# Altium PCB PCB_Design.PcbDoc
Units mm, origin at the board's own origin, x right, y up, seen from the top; angles counter-clockwise.
Board outline 125.69 x 113.79 mm, 2 copper layers (Top Layer, Bottom Layer); 23 components, 85 nets, 142 pads, 0 vias.
Unrouted connection lines stored in the file: 11.
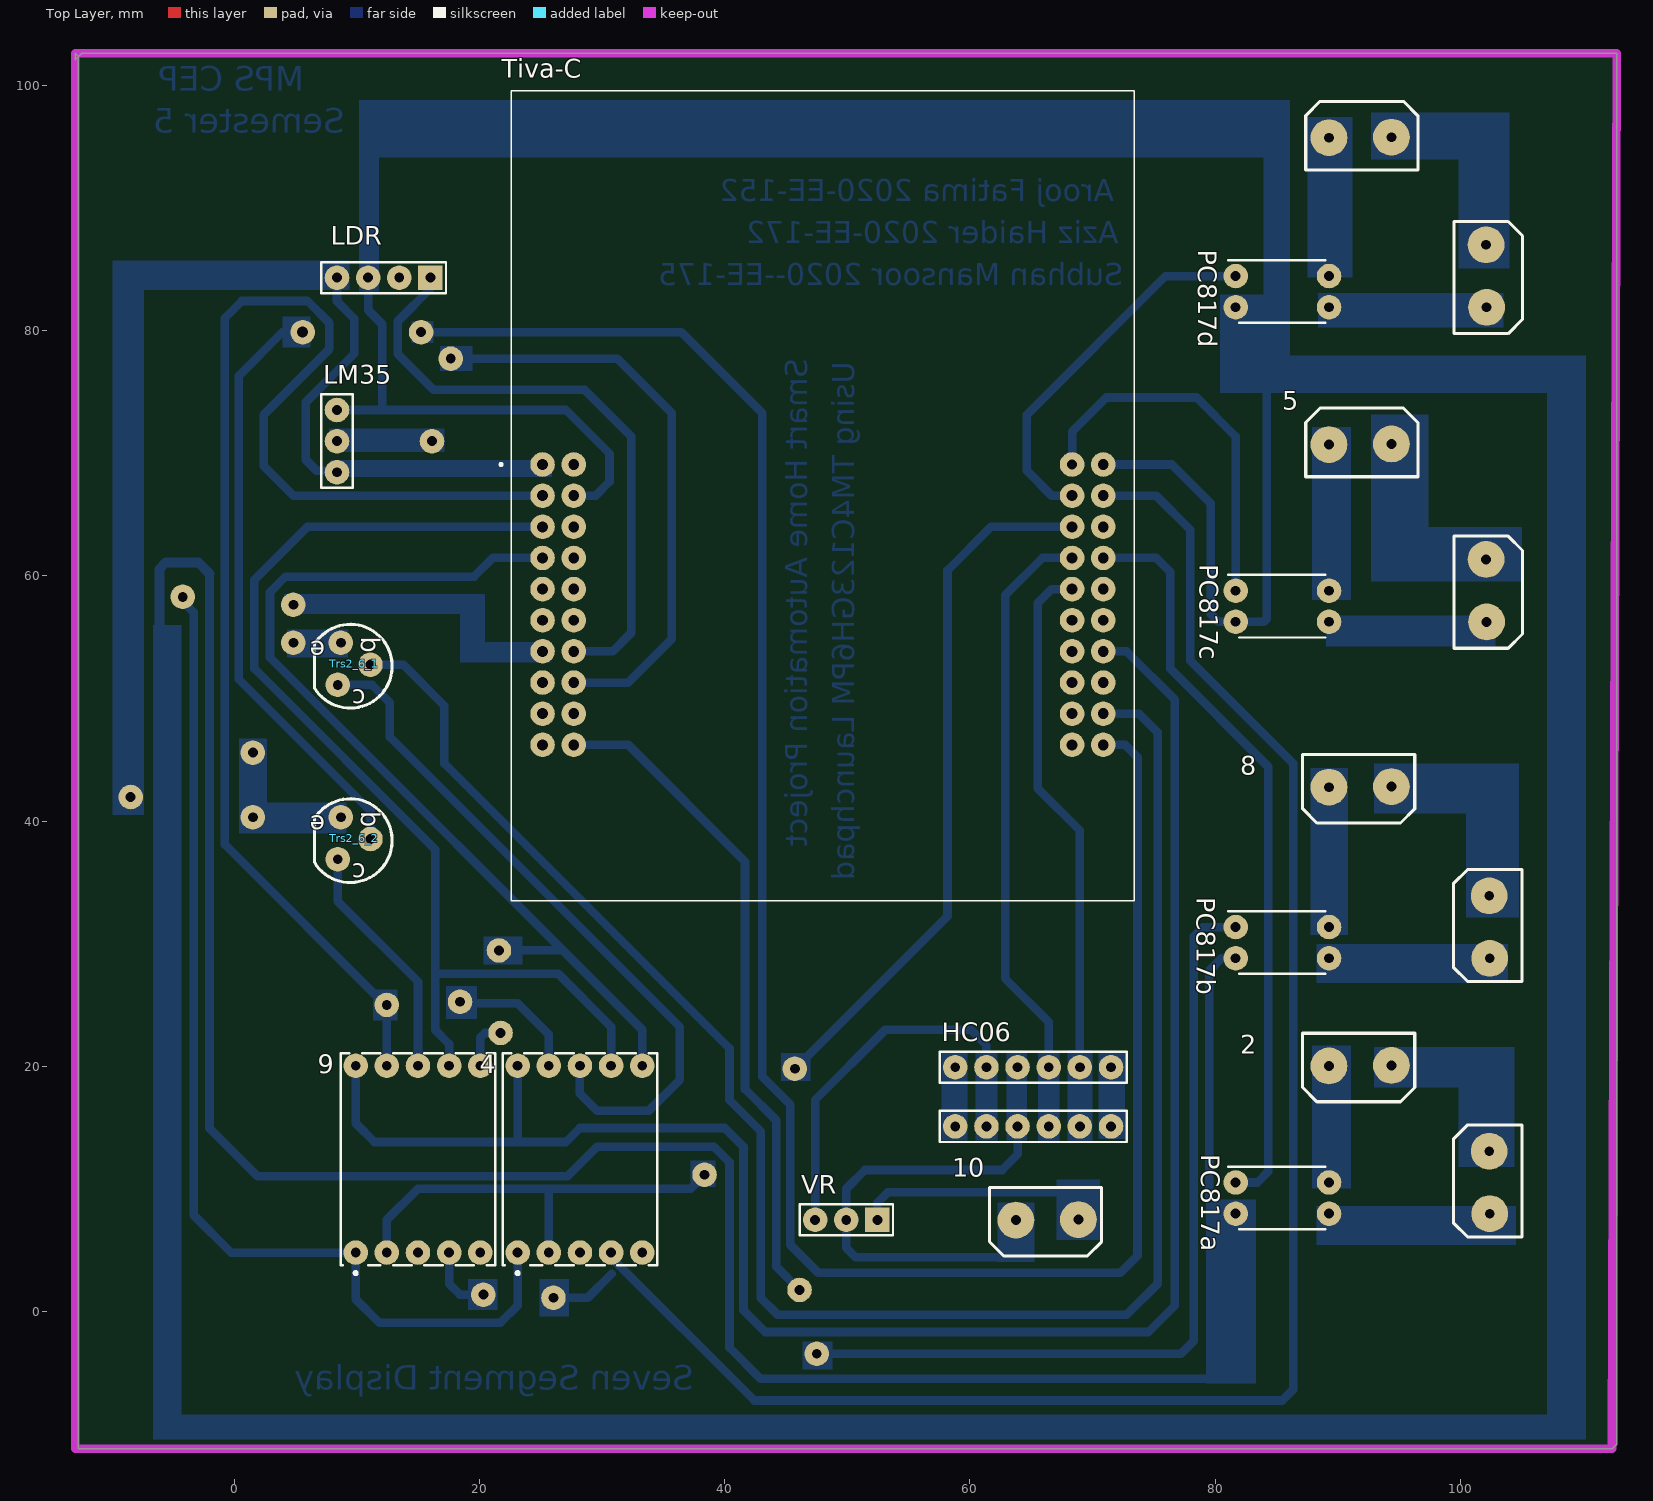
[diagram p0: Top Layer view]
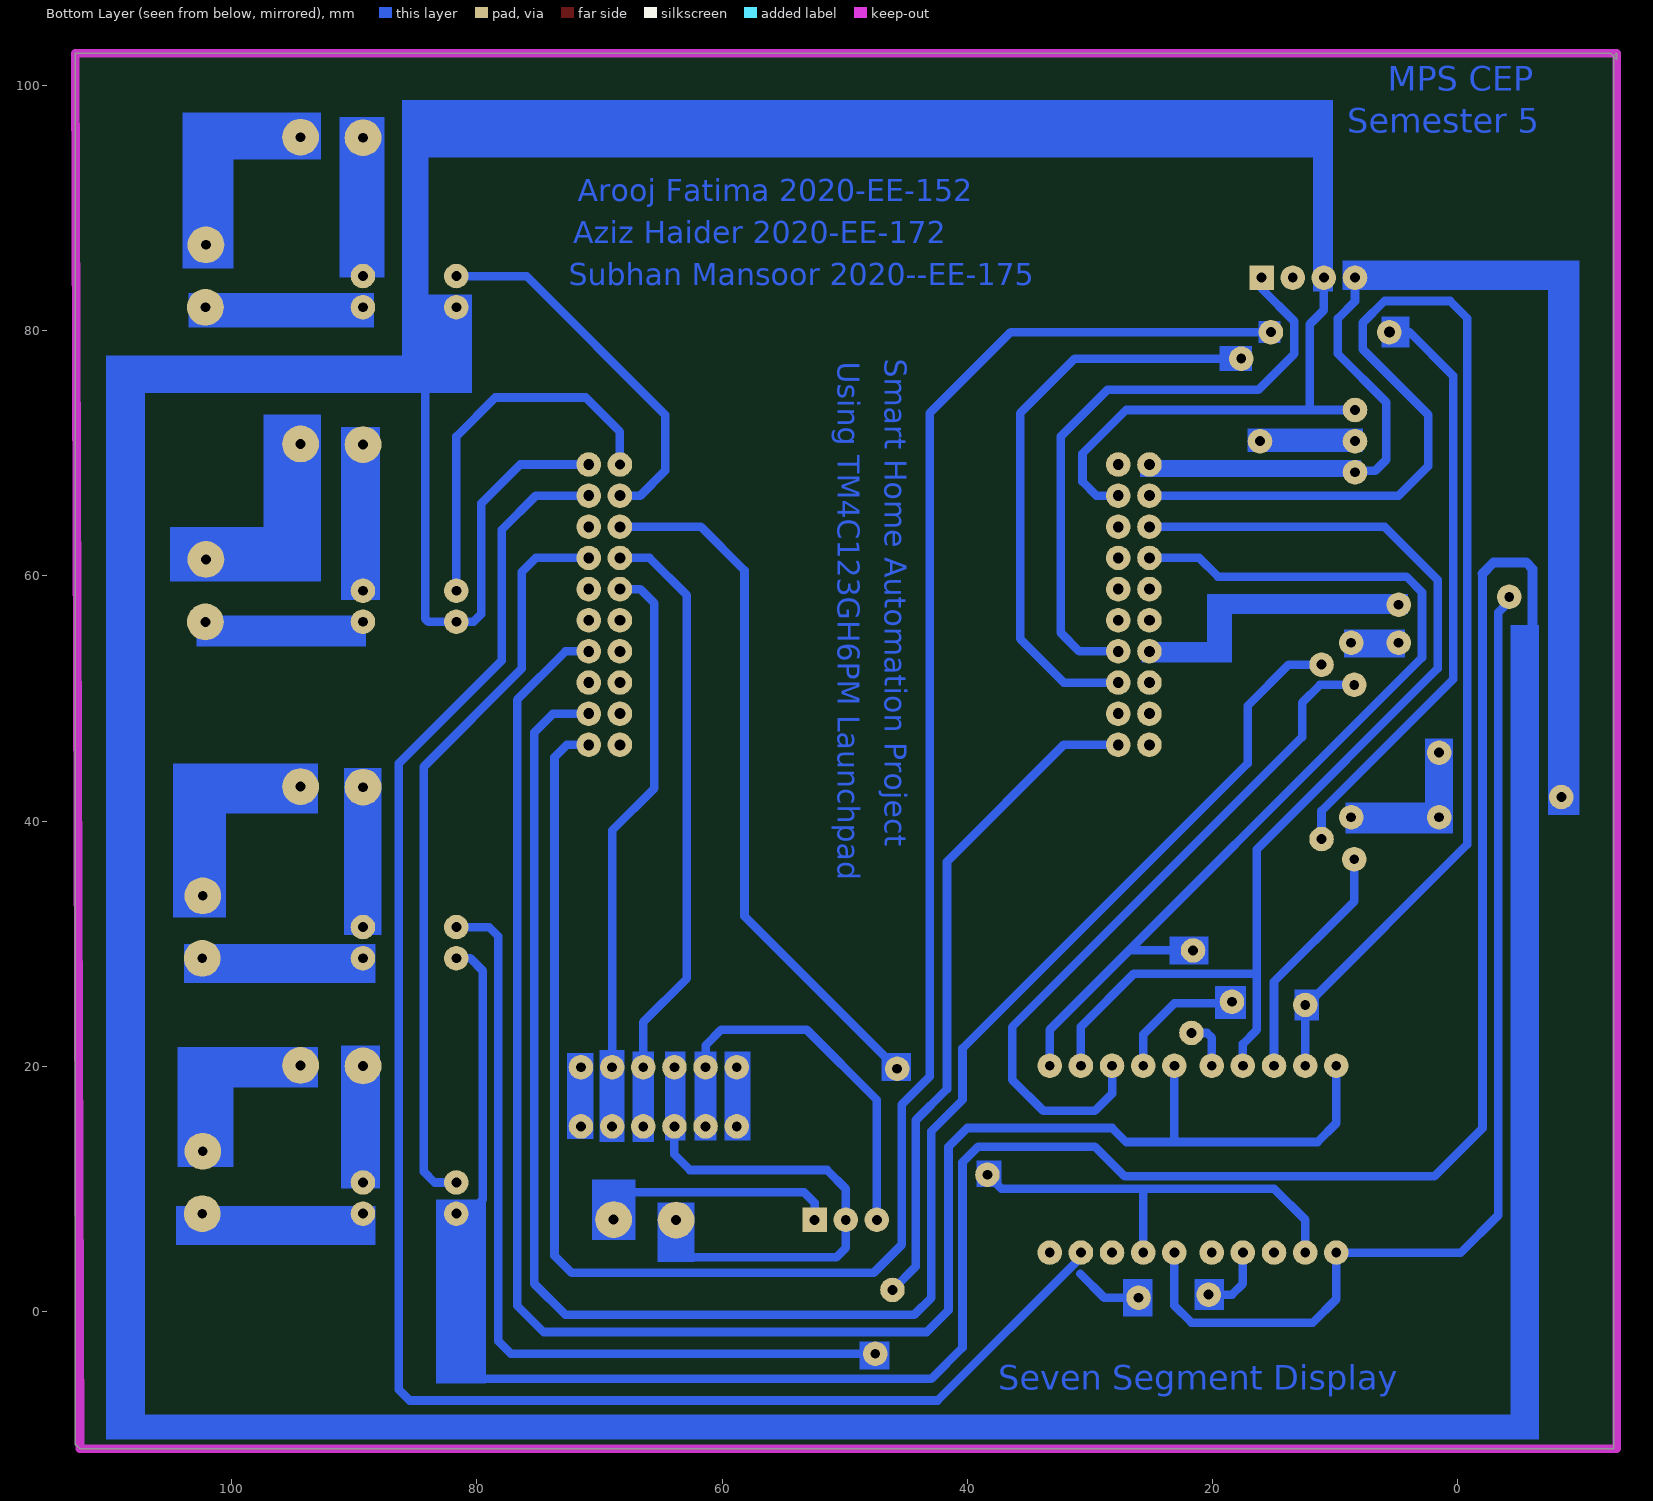
[diagram p1: Bottom Layer view, seen from below]

## Layer stack, top to bottom
Top Layer: signal copper 0.0356
Dielectric: dielectric 0.32, FR-4, Dk 4.8
Bottom Layer: signal copper 0.0356

## Board outline
-12.954,102.108 -12.446,102.616 112.732,102.616 112.732,-10.798 112.354,-11.176 -12.7,-11.176 -12.7,102.362 -12.954,102.616

## Design rules (kind name [scope] priority, off if disabled: settings)
Clearance [All] p1: gap=0.3
PolygonConnect [All] p1: connectstyle=Relief reliefconductorwidth=0.254 reliefentries=4 polygonreliefangle="90 Angle"
RoutingVias [All] p1: holewidth=0.711 width=1.27 viastyle="Through Hole" minholewidth=0.711 minwidth=1.27 maxholewidth=0.711 maxwidth=1.27
SilkscreenOverComponentPads [All] p1: minsilkscreentomaskgap=0.254
SolderMaskExpansion [All] p1: expansion=0.102
Width [All] p1: maxlimit=0.8 minlimit=0.254 preferedwidth=0.7 toplayer_maxwidth=0.254 toplayer_prefwidth=0.254 bottomlayer_minwidth=0.7 minimp=50.000000 maximp=50.000000 favimp=50.000000
27 further rules are at their usual default settings.

## Components (designator, comment, footprint, x,y, rotation, side; value= is the part's Value field where it differs from the comment)
2 "Comment" "PCB Block Connector" 91.821,20.066 r0 top
4 "Comment" LEDDIP-10/14.27RHD 28.194,12.446 r0 top
5 "Comment" "PCB Block Connector" 91.821,70.739 r180 top
8 "Comment" "PCB Block Connector" 91.821,42.799 r0 top
9 "Comment" LEDDIP-10/14.27RHD 14.986,12.446 r0 top
10 "Comment" "PCB Block Connector" 66.294,7.493 r0 top
HC06 "Comment" HDR1X6 71.501,19.939 r180 top
LDR "Comment" HDR1X4 16.002,84.328 r180 top
LM35 "Comment" HDR1X3#1 8.382,68.453 r90 top
PC817a "Comment" DIP762W60P254L460H450Q4N 85.471,9.271 r0 top
PC817b "Comment" DIP762W60P254L460H450Q4N 85.471,30.099 r0 top
PC817c "Comment" DIP762W60P254L460H450Q4N 85.471,57.531 r0 top
PC817d "Comment" DIP762W60P254L460H450Q4N 85.471,83.185 r0 top
Tiva-C "Comment" MODULE_EK-TM4C123GXL 48.006,66.548 r0 top
Trs2_6_1 "Comment" "TO-92 Packaging" 9.779,52.832 r180 top
Trs2_6_2 "Comment" "TO-92 Packaging" 9.779,38.608 r180 top
VR "Comment" HDR1X3#2 52.451,7.493 r180 top
? "Comment" "PCB Block Connector" 102.108,84.455 r90 top
? "Comment" "PCB Block Connector" 102.108,58.801 r90 top
? "Comment" "PCB Block Connector" 91.821,95.758 r180 top
? "Comment" "PCB Block Connector" 102.362,31.369 r270 top
? "Comment" HDR1X6 71.501,15.113 r180 top
? "Comment" "PCB Block Connector" 102.362,10.541 r270 top

## Footprints (in the part's own frame and the unit in brackets; to place one, negate y for a bottom-side part, rotate by r counter-clockwise, add the part's x,y. Pads: shape width x height; smd on the part's side, far side on the other; paste and mask are expansions set on the pad)
DIP762W60P254L460H450Q4N [mm]
  round 2 hole 0.8: 1(-3.81,1.27) 2(-3.81,-1.27) 3(3.81,-1.27) 4(3.81,1.27)
  silkscreen extent -4.41,-2.55 3.5,2.55
HDR1X3#1 [mm] "Connector; Header; 3 Position"
  round 2 hole 0.8: 1(0,0) 2(2.54,0) 3(5.08,0)
  silkscreen extent -1.27,-1.27 6.35,1.27
HDR1X3#2 [mm] "Connector; Header; 3 Position"
  rect 2x2 hole 0.8: 1(0,0)
  round 2 hole 0.8: 2(2.54,0) 3(5.08,0)
  silkscreen extent -1.27,-1.27 6.35,1.27
HDR1X4 [mm] "Connector; Header; 4 Position"
  rect 2x2 hole 0.8: 1(0,0)
  round 2 hole 0.8: 2(2.54,0) 3(5.08,0) 4(7.62,0)
  silkscreen extent -1.27,-1.27 8.89,1.27
HDR1X6 [mm] "Connector; Header; 6 Position"
  round 2 hole 0.8: 1(0,0) 2(2.54,0) 3(5.08,0) 4(7.62,0) 5(10.16,0) 6(12.7,0)
  silkscreen extent -1.27,-1.27 13.97,1.27
LEDDIP-10/14.27RHD [mm] "LED, 7-Segment Display, 14.27 mm, RHD; 10 Leads; Row Space 15.24 mm; Pitch 2.54 mm"
  round 2 hole 0.8: 1(-5.08,-7.62) 2(-2.54,-7.62) 3(0,-7.62) 4(2.54,-7.62) 5(5.08,-7.62) 6(5.08,7.62) 7(2.54,7.62) 8(0,7.62) 9(-2.54,7.62) 10(-5.08,7.62)
  silkscreen extent -6.3,-9.42 6.3,8.65, body extent -6.3,-8.65 6.3,8.65, height 8.3
MODULE_EK-TM4C123GXL [mm]
  round 2 hole 0.89: J1_1(-22.86,2.54) J1_2(-22.86,0) J1_3(-22.86,-2.54) J1_4(-22.86,-5.08) J1_5(-22.86,-7.62) J1_6(-22.86,-10.16) J1_7(-22.86,-12.7) J1_8(-22.86,-15.24) J1_9(-22.86,-17.78) J1_10(-22.86,-20.32) J2_1(22.86,2.54) J2_2(22.86,0) J2_3(22.86,-2.54) J2_4(22.86,-5.08) J2_5(22.86,-7.62) J2_6(22.86,-10.16) J2_7(22.86,-12.7) J2_8(22.86,-15.24) J2_9(22.86,-17.78) J2_10(22.86,-20.32) J3_1(-20.32,2.54) J3_2(-20.32,0) J3_3(-20.32,-2.54) J3_4(-20.32,-5.08) J3_5(-20.32,-7.62) J3_6(-20.32,-10.16) J3_7(-20.32,-12.7) J3_8(-20.32,-15.24) J3_9(-20.32,-17.78) J3_10(-20.32,-20.32) J4_2(20.32,0) J4_3(20.32,-2.54) J4_4(20.32,-5.08) J4_5(20.32,-7.62) J4_6(20.32,-10.16) J4_7(20.32,-12.7) J4_8(20.32,-15.24) J4_9(20.32,-17.78) J4_10(20.32,-20.32)
  round 2 hole 0.8: J4_1(20.32,2.54)
  silkscreen extent -26.35,-33.02 25.4,33.02
"PCB Block Connector" [mm]
  round 3 hole 0.8: 1(-2.547,-0.023) 2(2.547,0.023)
  silkscreen extent -4.7,-2.94 4.44,2.65
"TO-92 Packaging" [mm] "for 2N3904"
  round 2 hole 0.8: T(-1.333,0.063) T(1.08,-1.714) T(1.333,1.714)
  silkscreen extent -3.1,-3.23 3.22,3.61

## Part data
Tiva-C: library part EK-TM4C123GXL

## Free pads (board coordinates)
  round 2 hole 0.8: 2(20.32,1.397) 3(26.035,1.143) 4(38.354,11.176) 5(45.72,19.812) 6(21.59,29.464) 7(21.717,22.733) 8(18.415,25.273) 9(12.446,25.019) 11(15.24,79.883) 12(4.826,54.546) 14(46.101,1.778) 15(47.498,-3.429) 16(-8.445,41.974) 16(1.524,40.322) 16(1.524,45.593) 18(4.826,57.658) 19(-4.191,58.293) 20(17.653,77.724) 21(16.129,70.993)
  round 2 hole 0.9: 10(5.588,79.883)

## Nets (pads, with @x,y where several pads share a name; then routed paths per layer and width w, separated by ;. In a path a pad name is that pad's centre, name@x,y a point inside that pad or via, vN(x,y) a via of type N, cw(c..) or ccw(c..) an arc to the next point about the centre after c; other vN are vias at no path point)
1: 
2: 
3: 
3.3V: LDR.4 LM35.1 pad.12 pad.16 Tiva-C.J1_1 Trs2_6_1.T@8.7,54.546 Trs2_6_2.T@8.7,40.322 | length 112.4
  Bottom Layer w0.7: pad.16@-8.255,41.91 -8.255,84.319 8.373,84.319 LDR.4 8.382,82.398 9.778,81.002 9.778,78.104 5.842,74.168 5.842,69.469 6.731,68.58 8.255,68.58 LM35.1 9.017,69.088 Tiva-C.J1_1 ; pad.16@1.524,45.593 1.524,40.322 Trs2_6_2.T@8.7,40.322 ; pad.12 Trs2_6_1.T@8.7,54.546
4: 
5: 
6: 
7: 
8: 
9: 
dp1: 
EN: ?.6 HC06.6 | length 4.8
  Bottom Layer w0.7: ?.6 HC06.6
GND: LDR.3 LM35.3 PC817a.2 PC817b.2 PC817c.2 PC817d.2 Tiva-C.J2_1 Tiva-C.J3_2 | length 677.6
  Bottom Layer w0.7: -6.096,50.419 -5.588,49.911 -5.588,-7.62 -3.683,-9.525 ; -2.016,60.182 -2.016,14.97 1.921,11.033 27.162,11.033 29.591,13.462 39.116,13.462 40.386,12.192 40.386,-2.921 42.926,-5.461 79.502,-5.461 81.661,-3.302 PC817a.2 80.645,8.001 79.502,9.144 79.502,27.813 80.518,28.829 PC817b.2 ; LM35.3 27.051,73.533 30.607,69.977 30.607,67.691 29.464,66.548 Tiva-C.J3_2 ; 12.065,73.533 12.065,80.518 10.922,81.661 LDR.3 10.922,97.409 82.042,97.409 84.836,94.615 84.836,82.804 83.947,81.915 PC817d.2 81.661,77.47 82.169,76.962 84.201,76.962 ; Tiva-C.J2_1 76.454,69.088 79.629,65.913 79.629,56.896 80.264,56.261 PC817c.2 83.947,56.261 84.201,56.515 84.201,76.962 ; 107.696,-9.525 108.585,-8.636 108.585,75.438 107.061,76.962 84.201,76.962
  Bottom Layer w0.8: -6.096,50.419 -6.096,60.579 -5.588,61.087 -2.921,61.087 -2.016,60.182 ; -3.683,-9.525 107.696,-9.525
m1: 
m2: 
m3: ?.2@102.385,28.822 PC817b.3 | length 13.1
  Bottom Layer w0.7: PC817b.3 95.809,28.829 95.816,28.822 ?.2@102.385,28.822
m4: 8.1 PC817b.4 | length 11.4
  Bottom Layer w0.7: 8.1 89.274,37.066 89.281,37.059 PC817b.4
n1: 
n2: 
n3: ?.2@102.385,7.994 PC817a.3 | length 13.1
  Bottom Layer w0.7: PC817a.3 95.809,8.001 95.816,7.994 ?.2@102.385,7.994
n4: 2.1 PC817a.4 | length 9.5
  Bottom Layer w0.7: 2.1 89.274,15.298 89.281,15.291 PC817a.4
neg1: 
neg2: 
neg3: 
neg4: 
o1: 
o2: 
o3: ?.1@102.131,56.254 PC817c.3 | length 12.9
  Bottom Layer w0.7: PC817c.3 95.682,56.261 95.689,56.254 ?.1@102.131,56.254
o4: 5.2 PC817c.4 | length 11.9
  Bottom Layer w0.7: 5.2 89.274,64.752 89.281,64.745 PC817c.4
p1: 
p2: 
p3: ?.1@102.131,81.908 PC817d.3 | length 12.9
  Bottom Layer w0.7: PC817d.3 95.682,81.915 95.689,81.908 ?.1@102.131,81.908
p4: ?.2@89.274,95.735 PC817d.4 | length 11.3
  Bottom Layer w0.7: ?.2@89.274,95.735 89.274,90.101 89.281,90.094 PC817d.4
PA2: pad.10 pad.11 Tiva-C.J2_10 Trs2_6_2.T@11.112,38.544 | length 221.9
  Bottom Layer w0.7: pad.10 3.937,79.883 0.381,76.327 0.381,51.562 11.112,40.831 Trs2_6_2.T@11.112,38.544 ; pad.11 36.449,79.883 43.053,73.279 43.053,19.177 45.339,16.891 45.339,5.461 47.625,3.175 72.263,3.175 73.66,4.572 73.66,45.212 72.644,46.228 Tiva-C.J2_10
PA3: Tiva-C.J2_9 Trs2_6_1.T@11.112,52.768 | length 150.4
  Bottom Layer w0.7: Trs2_6_1.T@11.112,52.768 13.779,52.768 17.145,49.403 17.145,44.704 40.386,21.463 40.386,17.272 42.926,14.732 42.926,1.143 44.323,-0.254 72.771,-0.254 75.311,2.286 75.311,47.244 73.787,48.768 Tiva-C.J2_9
PA4: Tiva-C.J2_8
PA5: Tiva-C.J1_8
PA6: Tiva-C.J1_9
PA7: Tiva-C.J1_10
PB0: 4.7 9.7 Tiva-C.J1_3 | length 90.8
  Bottom Layer w0.7: 16.383,27.559 26.416,27.559 30.734,23.241 4.7 ; 9.7 17.526,21.844 16.383,22.987 16.383,37.719 1.651,52.451 1.651,59.69 5.969,64.008 Tiva-C.J1_3
PB1: 4.6 9.6 pad.6 pad.7 Tiva-C.J1_4 | length 83.9
  Bottom Layer w0.7: 9.6 20.066,22.352 20.447,22.733 pad.7 ; pad.6 26.797,29.464 ; Tiva-C.J1_4 21.082,61.468 19.558,59.944 4.191,59.944 2.921,58.674 2.921,53.34 33.274,22.987 4.6
PB2: 4.4 9.4 pad.2 pad.3 Tiva-C.J2_2 | length 154.3
  Bottom Layer w0.7: 9.4 17.526,2.286 18.415,1.397 pad.2 ; pad.3 28.829,1.143 30.797,3.111 ; 4.4 30.734,4.445 42.418,-7.239 85.471,-7.239 86.36,-6.35 86.36,44.704 77.978,53.086 77.978,63.754 75.184,66.548 Tiva-C.J2_2
PB3: 4.2 9.2 pad.4 pad.5 Tiva-C.J4_3 | length 93.3
  Bottom Layer w0.7: 9.2 12.446,7.493 14.986,10.033 25.654,10.033 ; 4.2 25.654,10.033 ; pad.4@38.735,11.557 37.211,10.033 25.654,10.033 ; pad.5 58.166,32.258 58.166,60.452 61.722,64.008 Tiva-C.J4_3
PB4: 4.1 9.1 pad.18 pad.19 Tiva-C.J1_7 | length 111.4
  Bottom Layer w0.7: pad.19@-4.191,57.912 -3.302,57.023 -3.302,7.874 -0.254,4.826 9.1 9.906,1.016 11.811,-0.889 21.717,-0.889 23.114,0.508 4.1 ; pad.18@4.699,57.785 19.558,57.785 19.558,54.737 20.447,53.848 Tiva-C.J1_7
PB5: 4.9 9.9 pad.8 pad.9 Tiva-C.J1_2 | length 127.4
  Bottom Layer w0.7: 9.9 12.446,22.733 ; pad.9 12.446,22.733 ; pad.8@18.542,25.146 23.114,25.146 25.654,22.606 4.9 ; Tiva-C.J1_2@24.765,66.167 Tiva-C.J1_2 4.826,66.548 2.413,68.961 2.413,73.152 7.747,78.486 7.747,80.645 5.969,82.423 0.635,82.423 -0.762,81.026 -0.762,38.1 12.446,24.892 12.446,22.733
PB6: 4.10 9.10 Tiva-C.J2_7 | length 151.3
  Bottom Layer w0.7: 9.10 9.906,15.367 11.43,13.843 27.051,13.843 28.194,14.986 40.005,14.986 41.529,13.462 41.529,0.127 43.307,-1.651 74.549,-1.651 76.708,0.508 76.708,49.911 72.771,53.848 Tiva-C.J2_7 ; 23.114,13.843 4.10
PB7: Tiva-C.J2_6
PC4: ?.3 HC06.3 Tiva-C.J4_4 | length 51.5
  Bottom Layer w0.7: ?.3 66.421,23.622 62.865,27.178 62.865,58.42 65.913,61.468 Tiva-C.J4_4
PC5: ?.2@68.961,15.113 HC06.2 Tiva-C.J4_5 | length 47.7
  Bottom Layer w0.7: Tiva-C.J4_5@68.58,58.674 Tiva-C.J4_5 66.675,58.928 65.532,57.785 65.532,42.672 68.961,39.243 HC06.2 ?.2@68.961,15.113
PC6: Tiva-C.J4_6
PC7: Tiva-C.J4_7
PD0: Tiva-C.J3_3
PD1: Tiva-C.J3_4
PD2: Tiva-C.J3_5
PD3: Tiva-C.J3_6
PD6: Tiva-C.J4_8
PD7: Tiva-C.J4_9
PE0: Tiva-C.J2_3
PE1: LDR.1 Tiva-C.J3_7 | length 50.5
  Bottom Layer w0.7: LDR.1 16.002,83.439 13.335,80.772 13.335,78.105 16.256,75.184 28.575,75.184 32.385,71.374 32.385,55.372 30.861,53.848 Tiva-C.J3_7
PE2: LM35.2 pad.20 pad.21 Tiva-C.J3_8 | length 55.3
  Bottom Layer w0.7: LM35.2 pad.21@15.875,70.993 ; pad.20 31.242,77.724 35.687,73.279 35.687,54.864 32.131,51.308 Tiva-C.J3_8
PE3: Tiva-C.J3_9
PE4: Tiva-C.J1_5
PE5: Tiva-C.J1_6
PF0: PC817a.1 Tiva-C.J2_4 | length 61.2
  Bottom Layer w0.7: Tiva-C.J2_4 75.184,61.468 76.327,60.325 76.327,52.451 84.328,44.45 84.328,11.43 83.439,10.541 PC817a.1
PF1: pad.14 pad.15 PC817b.1 Tiva-C.J3_10 | length 122.6
  Bottom Layer w0.7: Tiva-C.J3_10 32.131,46.228 41.656,36.703 41.656,18.161 44.196,15.621 44.196,3.683 pad.14 ; pad.15 77.216,-3.429 78.232,-2.413 78.232,30.607 78.994,31.369 PC817b.1
PF2: PC817c.1 Tiva-C.J4_1 | length 31
  Bottom Layer w0.7: Tiva-C.J4_1 68.326,71.755 71.12,74.549 78.486,74.549 81.661,71.374 PC817c.1
PF3: PC817d.1 Tiva-C.J4_2 | length 30.8
  Bottom Layer w0.7: Tiva-C.J4_2 66.675,66.548 64.643,68.58 64.643,73.152 75.946,84.455 PC817d.1
PF4: Tiva-C.J4_10
pos1: 2.2 ?.1@102.339,13.088 | length 13.6
  Bottom Layer w0.7: 2.2 100.076,20.089 102.339,17.825 ?.1@102.339,13.088
pos2: 8.2 ?.1@102.339,33.916 | length 16.3
  Bottom Layer w0.7: 8.2 101.323,42.822 102.339,41.806 ?.1@102.339,33.916
pos3: ?.1@94.368,95.781 ?.2@102.085,87.002 | length 15.4
  Bottom Layer w0.7: ?.1@94.368,95.781 100.158,95.781 102.085,93.853 ?.2@102.085,87.002
pos4: 5.1 ?.2@102.085,61.348 | length 16.6
  Bottom Layer w0.7: 5.1 94.368,62.223 95.243,61.348 ?.2@102.085,61.348
pos5: 
RST: Tiva-C.J2_5
RxD: 
TxD: 
VBUS: Tiva-C.J3_1
VCC: ?.5 HC06.5 VR.3 | length 33.2
  Bottom Layer w0.7: VR.3 47.371,17.272 53.086,22.987 60.071,22.987 61.341,21.717 HC06.5 ?.5
VCC+: 4.8 Trs2_6_1.T@8.445,51.117 | length 57.5
  Bottom Layer w0.7: Trs2_6_1.T@8.445,51.117 11.239,51.117 12.7,49.657 12.7,46.863 36.347,23.216 36.347,18.923 33.807,16.383 29.591,16.383 28.194,17.78 4.8
VCC+1: 9.8 Trs2_6_2.T@8.445,36.893 | length 19.5
  Bottom Layer w0.7: Trs2_6_2.T@8.445,36.893 8.445,33.465 14.986,26.924 9.8
VCC-: 4.3
VCC-1: 9.3
vr1: 10.2 VR.1 | length 20.1
  Bottom Layer w0.7: VR.1 52.451,8.89 53.289,9.728 68.377,9.728 68.841,9.264 10.2
vr2: 10.1 ?.4 HC06.4 VR.2 | length 43.7
  Bottom Layer w0.7: 10.1 63.747,5.454 62.738,4.445 50.673,4.445 49.911,5.207 VR.2 49.911,10.033 51.435,11.557 62.611,11.557 63.881,12.827 ?.4 HC06.4
vr3: 
pads on no net: 4.5 9.5 ?.1@71.501,15.113 HC06.1 LDR.2

## Keep-outs
Keep-Out Layer:
  lines w0.7: -12.954,-11.176 112.354,-11.176 112.732,102.616 -12.954,102.616 -12.954,-11.176

## Other copper
Bottom Layer:
  rectangle: 70.485,14.097 72.644,21.082
  rectangle net vr2: 62.992,13.97 64.643,21.209
  rectangle net VCC: 60.452,13.97 62.23,21.209
  rectangle net PC4: 65.532,13.843 67.31,21.209
  rectangle net PC5: 67.945,13.843 69.977,21.336
  rectangle net EN: 57.658,13.97 59.817,21.209
  rectangle net vr1: 67.056,5.842 70.612,10.795
  rectangle net vr2: 62.23,4.064 65.278,8.89
  rectangle net PA2: 14.478,78.994 16.256,80.772
  rectangle net PE2: 16.764,76.708 19.431,78.74
  rectangle net PA2: 3.937,78.613 6.223,81.153
  rectangle net 3.3V: 7.874,68.072 25.908,69.469
  rectangle net PE2: 7.747,70.104 17.145,72.009
  rectangle net PB5: 11.303,23.749 13.335,26.289
  rectangle net PB5: 17.272,23.876 19.812,26.543
  rectangle net PB1: 20.32,28.321 23.495,30.607
  rectangle net PB3: 37.211,10.16 39.243,12.319
  rectangle net PB3: 44.577,18.796 46.99,21.082
  rectangle net GND: 79.248,-5.842 83.312,9.144
  rectangle net m4: 87.757,30.734 90.805,44.323
  rectangle net pos2: 100.457,32.131 104.775,44.704
  rectangle net pos2: 92.964,40.64 104.521,44.704
  rectangle net m3: 88.265,26.797 103.886,29.972
  rectangle net PF1: 46.355,-4.699 48.768,-2.413
  rectangle net PB2: 19.05,0.127 21.463,2.667
  rectangle net PB2: 24.892,-0.381 27.305,2.667
  rectangle net 3.3V: 4.318,53.34 9.271,55.626
  rectangle net 3.3V: 0.381,38.989 9.144,41.529
  rectangle net 3.3V: 0.381,39.37 2.667,46.736
  rectangle net GND: 10.16,83.185 11.811,98.806
  rectangle net 3.3V: -9.906,83.312 9.398,85.725
  rectangle net 3.3V: -9.906,40.513 -7.366,85.09
  rectangle net GND: -6.604,-10.414 110.236,-8.382
  rectangle net n3: 88.265,5.461 104.521,8.636
  rectangle net pos1: 99.822,11.811 104.394,21.59
  rectangle net pos1: 92.964,18.288 103.632,21.59
  rectangle net n4: 87.884,10.033 91.059,21.717
  rectangle net o4: 87.884,58.039 91.059,72.136
  rectangle net o3: 89.027,54.229 102.87,56.769
  rectangle net pos4: 92.71,59.563 105.029,64.008
  rectangle net pos4: 92.71,60.071 97.409,73.152
  rectangle net p4: 87.503,84.328 91.186,97.409
  rectangle net pos3: 99.822,85.09 104.013,97.79
  rectangle net pos3: 92.71,93.98 103.759,97.79
  rectangle net p3: 88.392,80.264 103.505,83.058
  rectangle net GND: 81.788,75.819 86.106,81.026
  rectangle net GND: 80.391,74.93 110.236,77.978
  rectangle net GND: 80.391,76.2 82.804,82.931
  rectangle net GND: 80.391,80.01 86.106,82.931
  rectangle net GND: 83.947,80.899 86.106,98.806
  rectangle net GND: 107.061,-9.652 110.236,77.343
  rectangle net GND: 86.868,-10.16 110.236,-8.382
  rectangle net GND: 10.287,94.107 86.106,98.806
  rectangle net GND: -6.604,-10.033 -4.318,56.007
  rectangle net PB4: 4.064,56.896 19.939,58.547
  rectangle net PB4: 18.415,53.467 20.447,58.547
  rectangle net PB4: 18.415,52.959 25.781,54.61
  text "MPS CEP" at 5.715,99.568 h2
  text "Semester 5" at 9.017,96.139 h2
  text "Arooj Fatima 2020-EE-152" at 71.755,90.551 h1.8
  text "Aziz Haider 2020-EE-172" at 72.136,87.122 h1.8
  text "Subhan Mansoor 2020--EE-175" at 72.517,83.693 h1.8
  text "Smart Home Automation Project" at 46.736,77.724 h1.8 r90
  text "Using TM4C123GH6PM Launchpad" at 50.546,77.47 h1.8 r90
  text "Seven Segment Display" at 37.465,-6.35 h2

## Text inside footprints (layer, text, board x,y; h text height)
Trs2_6_1: Top Overlay "b" at 10.351,55.054 h1.52 r270; Top Overlay "e" at 7.429,54.673 h1.5 r180; Top Overlay "c" at 10.731,50.736 h1.5 r180
Trs2_6_2: Top Overlay "b" at 10.351,40.831 h1.52 r270; Top Overlay "e" at 7.429,40.45 h1.5 r180; Top Overlay "c" at 10.731,36.512 h1.5 r180